# Allegro board CPDK.brd
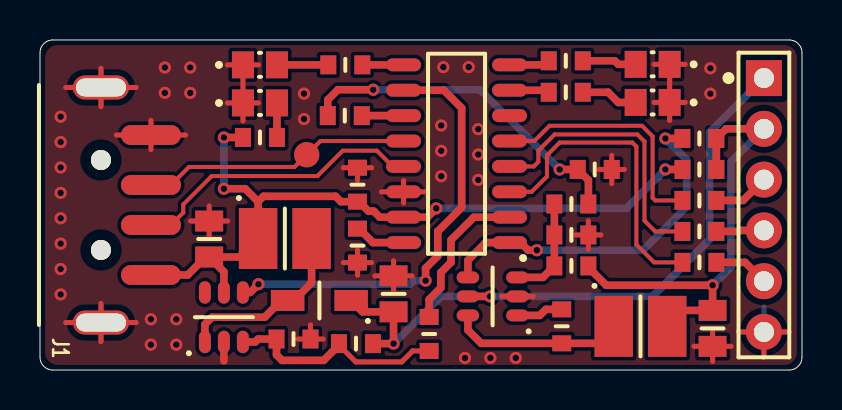
[diagram p0: board, top side]
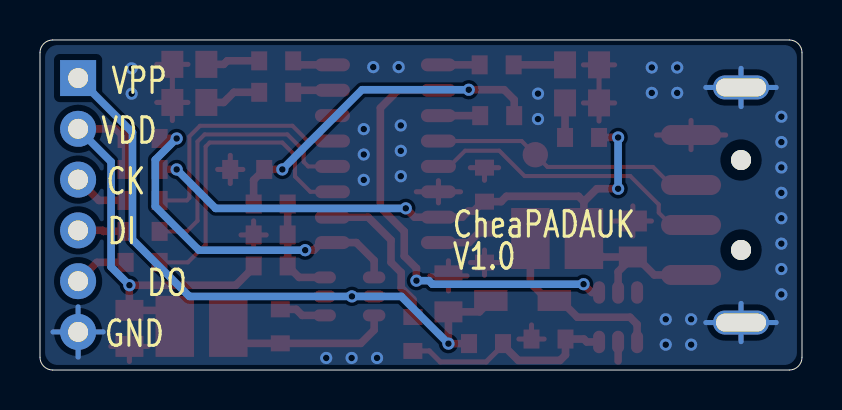
[diagram p1: board, bottom side, seen from below]

Outline 38.1 x 16.51 mm; copper layers: TOP, BOTTOM. Coordinates in mm from the lower left corner of the outline.
Outline path: 0,15.88 0,0.64 arc(0.19,0.19) 0.64,0 37.47,0 arc(37.91,0.19) 38.1,0.64 38.1,15.88 arc(37.91,16.32) 37.47,16.51 0.64,16.51 arc(0.19,16.32) 0,15.88

## Design rules (mm)
constraint set DEFAULT: min track width 0.203

## Placement (name value [footprint] x y rotation side)
C1  4.7uF  [CAPC2013X125N]  8.46 6.55 90 top
C2  104  [CAPC1608X50N]  15.88 9.27 90 top
C3  104  [CAPC1608X50N]  15.88 6.22 270 top
C4  104  [CAPC1608X50N]  26.09 2.18 270 top
C5  4.7uF  [CAPC2013X125N]  33.63 2.08 270 top
C6  104  [CAPC1608X50N]  27.74 10.03 0 top
C7  4.7uF 25V  [CAPC2013X125N]  17.68 3.81 90 top
D1  SS24  [DIOM3618X280N]  13.97 3.48 180 top
D2  PWR  [LEDC2012X140N]  11 13.36 0 top
D3  LED1  [LEDC2012X140N]  11 15.27 0 top
D4  LED2  [LEDC2012X140N]  30.63 15.29 180 top
D5  LED3  [LEDC2012X140N]  30.63 13.39 180 top
J1  USB  [USB_07]  3.05 8.26 270 top
J2  PDK  [SHDR0S254P6X1_1524X254X500]  36.2 14.61 270 top
L1  6.8uH  [INDM3530X280N]  12.24 6.58 0 top
L2  6.8uH  [INDM3530X280N]  30.02 2.18 0 top
R1  47  [CAPC1608X50N]  32.97 8.48 0 top
R2  47  [CAPC1608X50N]  32.97 6.93 0 top
R3  47  [CAPC1608X50N]  32.97 5.38 0 top
R4  20k  [CAPC1608X50N]  15.24 12.73 180 top
R5  NC  [CAPC1608X50N]  32.97 10.03 0 top
R6  NC  [CAPC1608X50N]  32.97 11.58 0 top
R7  24k  [CAPC1608X50N]  26.57 5.21 180 top
R8  6.8k  [CAPC1608X50N]  26.57 8.31 180 top
R9  36k  [CAPC1608X50N]  15.8 1.32 180 top
R10  56k  [CAPC1608X50N]  19.46 1.8 270 top
R11  2.7k  [CAPC1608X50N]  26.57 6.76 0 top
R12  2.2k  [CAPC1608X50N]  12.67 1.55 0 top
R13  R  [CAPC1608X50N]  11 11.63 0 top
R14  R  [CAPC1608X50N]  15.27 15.27 180 top
R15  R  [CAPC1608X50N]  26.29 15.47 0 top
R16  R  [CAPC1608X50N]  26.29 13.89 0 top
TP1  DL  [TP127]  13.34 10.77 0 top
U1  CH551G  [SOP127P600X140-16N]  20.83 10.82 180 top
U2  MT3608  [SOT95P280X112-6N]  9.19 2.64 90 top
U3  FR9885  [SOT95P280X112-6N]  22.63 3.68 180 top

## Library data of the parts
C1-C7 = CAP NP
D1 = DIODE
D2-D5 = LED
J1 = USB B TYPE
J2 = CON6
L1 L2 = INDUCTOR
R1-R16 = R
TP1 = T POINT R
U1 = CH551G
U2 = MT3608
U3 = FR9885

## Footprints (pads in the part's own frame, mm; a bottom-side part is the same pattern mirrored in y, then rotated)
CAPC1608X50N
  rect 0.8x0.95 smd: 1(-0.85,0) 2(0.85,0)
CAPC2013X125N
  rect 1.05x1.4 smd: 1(-0.9,0) 2(0.9,0)
DIOM3618X280N
  rect 1.675x1.05 smd: 1(-1.587,0) 2(1.587,0)
INDM3530X280N
  rect 1.925x3.05 smd: 1(-1.338,0) 2(1.338,0)
LEDC2012X140N
  rect 1.1x1.35 smd: 1(-0.85,0) 2(0.85,0)
SHDR0S254P6X1_1524X254X500
  rect 1.8x1.8 hole 1: 1(0,0)
  round 1.8 hole 1: 2(2.54,0) 3(5.08,0) 4(7.62,0) 5(10.16,0) 6(12.7,0)
SOP127P600X140-16N
  oval 1.75x0.65 smd: 1(-2.65,4.445) 2(-2.65,3.175) 3(-2.65,1.905) 4(-2.65,0.635) 5(-2.65,-0.635) 6(-2.65,-1.905) 7(-2.65,-3.175) 8(-2.65,-4.445) 9(2.65,-4.445) 10(2.65,-3.175) 11(2.65,-1.905) 12(2.65,-0.635) 13(2.65,0.635) 14(2.65,1.905) 15(2.65,3.175) 16(2.65,4.445)
SOT95P280X112-6N
  oval 1.125x0.6 smd: 1(-1.237,0.95) 2(-1.237,0) 3(-1.237,-0.95) 4(1.237,-0.95) 5(1.237,0) 6(1.237,0.95)
TP127
  round 1.27 smd: 1(0,0)
USB_07
  round 1 hole 1.3 unplated: (-2.25,0) (2.25,0)
  oval 1x3 smd: 1(3.5,2.5) 2(1,2.5) 3(-1,2.5) 4(-3.5,2.5)
  oval 1.2x2.8 hole 0.9x2.5: M1(5.88,0) M2(-5.88,0)

## Nets
5V: C1.1 C2.1 J1.1(VBUS) L1.1 R5.1 R13.1 U1.15(VDD) U2.5
GND: C1.2 C2.2 C3.2 C5.2 C6.2 C7.2 D2.1(CATHODE) D3.1(CATHODE) D4.1(CATHODE) D5.1(CATHODE) J1.4 J1.M1 J1.M2 J2.6 R11.2 R12.2 U1.14 U2.2 U3.2
VDD: C5.1 J2.2 L2.2 R5.2 R6.2 R7.1
VDD_EN: R6.1 U1.1 U3.4
LED1: R14.1 U1.9
LED2: R15.1 U1.8
LED3: R16.1 U1.7
MISO: R2.1 U1.4
MOSI: R3.1 U1.3
PWM2: R4.1 U1.11
SCK: R1.1 U1.5
USB_DM: J1.2 U1.13
USB_DP: J1.3 TP1.1(TP) U1.12
VPP: C7.1 D1.1(K) J2.1 R9.1 U3.5(VIN)
VPP_EN: U1.10 U2.4
VPP_SEL: R10.1 U1.2
N01030: R9.2 R10.2 R12.1 U2.3
N01431: D1.2 L1.2 U2.1(SW)
N02182: R7.2 R8.2 R11.1 U3.3
N02430: J2.3 R1.2
N02432: J2.4 R2.2
N02436: J2.5 R3.2
N02570: C6.1 R4.2 R8.1
N02792: C3.1 U1.16
N03295: C4.1 U3.1
N03302: C4.2 L2.1 U3.6
N04380: D3.2 R14.2
N04451: D4.2 R15.2
N04568: D5.2 R16.2
N04951: D2.2 R13.2

Pads without a net: U1 6; U2 6

## Via types
v1: diameter 0.61, hole 0.33, TOP to BOTTOM, 44 vias

## Routing (per net, layer and track width the routed paths; a pad name or vN(x,y) marks a point on that pad's centre or on a via; arc(x,y) is an arc through that point)
5V: length 38.3
  TOP w0.381: 10.91,8.42 11.17,8.69 14.78,8.69 15.05,8.42 C2.1 15.95,8.42 16.42,7.95 16.68,7.95 16.99,7.65 U1.15 19.37,7.65 v1(19.81,8.09) ; 10.91,8.42 L1.1 9.98,5.65 C1.1 ; 10.91,8.42 10.26,9.07 v1(9.19,9.07) ; C1.1 9.19,4.92 U2.5 ; C1.1 8.28,5.65 7.38,4.75 J1.1 ; R5.1 v1(31.27,10.03) ; R13.1 v1(9.19,11.63)
  BOTTOM w0.381: v1(31.27,10.03) 29.32,8.09 v1(19.81,8.09) ; v1(9.19,11.63) v1(9.19,9.07)
GND: length 75
  TOP w0.254: 8.46,6.7 C1.2 ; C1.2 7.53,7.45 ; C1.2 9.39,7.45 ; C1.2 8.46,8.21 ; J1.M2 4.8,14.14 ; J1.M2 1.29,14.14 ; J1.M2 3.05,15.09 ; J1.M2 3.05,13.18 ; C3.2 16.58,5.37 ; C3.2 15.88,6 ; C3.2 15.17,5.37 ; C3.2 15.88,4.74 ; 3.05,1.42 J1.M1 ; J1.M1 1.29,2.37 ; J1.M1 3.05,3.33 ; J1.M1 4.8,2.37 ; C5.2 33.63,1.94 ; C5.2 32.7,1.18 ; C5.2 33.63,0.43 ; C5.2 34.56,1.18 ; 23.08,3.68 U3.2 24.66,3.68 ; 16.75,4.71 C7.2 ; C7.2 17.68,5.46 ; C7.2 18.61,4.71 ; C7.2 17.68,3.96 ; 30.7,13.39 D5.1 ; D5.1 32.26,13.39 ; D5.1 31.48,12.48 ; D5.1 31.48,14.29 ; 10.15,14.36 D3.1 ; D3.1 9.37,15.27 ; D3.1 10.93,15.27 ; 12.9,1.55 R12.2 ; R12.2 13.52,2.25 ; R12.2 14.15,1.55 ; 34.94,1.91 36.2,1.91 ; 36.2,1.91 36.2,0.65 ; 36.2,1.91 37.45,1.91 ; U1.14 18.18,9.47 ; U1.14 18.18,8.36 ; U1.14 17.07,8.92 ; U1.14 19.28,8.92 ; R11.2 27.42,7.46 ; R11.2 27.42,6.05 ; R11.2 28.05,6.76 ; R11.2 26.79,6.76 ; 15.17,10.12 C2.2 ; C2.2 16.58,10.12 ; C2.2 15.88,9.49 ; 28.59,9.33 C6.2 ; C6.2 29.22,10.03 ; C6.2 27.96,10.03 ; C6.2 28.59,10.74 ; 3.82,11.76 J1.4 ; J1.4 5.55,11.03 ; J1.4 5.55,12.48 ; J1.4 7.28,11.76 ; 9.37,13.36 D2.1 ; D2.1 10.15,14.26 ; D2.1 10.15,12.46 ; D2.1 10.93,13.36 ; 31.48,14.39 D4.1 ; D4.1 32.26,15.29 ; D4.1 30.7,15.29
  TOP w0.381: U2.2 9.19,0.46
  BOTTOM w0.254: J1.M2 4.8,14.14 ; J1.M2 1.29,14.14 ; J1.M2 3.05,15.09 ; J1.M2 3.05,13.18 ; 36.2,1.91 37.45,1.91 ; 36.2,1.91 36.2,3.16 ; 36.2,1.91 36.2,0.65 ; 36.2,1.91 34.94,1.91 ; 1.29,2.37 J1.M1 ; J1.M1 4.8,2.37 ; J1.M1 3.05,1.42 ; J1.M1 3.05,3.33
  vias: v1(1.03,12.67) v1(1.03,11.4) v1(1.03,10.13) v1(1.03,8.86) v1(1.03,7.59) v1(1.03,6.32) v1(1.03,5.05) v1(1.03,3.78) v1(5.54,2.54) v1(5.54,1.27) v1(6.24,15.13) v1(6.24,13.86) v1(6.81,2.54) v1(6.81,1.27) v1(7.51,15.13) v1(7.51,13.86) v1(13.2,13.83) v1(13.2,12.56) v1(20.06,12.23) v1(20.06,10.96) v1(20.06,9.69) v1(20.17,15.15) v1(21.25,0.6) v1(21.44,15.15) v1(21.91,12.05) v1(21.91,10.78) v1(21.91,9.51) v1(22.52,0.6) v1(23.79,0.6) v1(33.52,15.09) v1(33.52,13.82)
VDD: length 23.5
  TOP w0.381: 36.2,12.06 34.3,12.06 R6.2 R5.2 ; R7.1 27.42,5.13 28.31,4.24 v1(33.63,4.24) C5.1 32.16,2.98 L2.2
  BOTTOM w0.381: v1(33.63,4.24) 34.54,5.16 34.54,10.41 36.2,12.06
VDD_EN: length 17.9
  TOP w0.381: R6.1 v1(31.27,11.58) ; v1(24.84,5.99) 24.41,5.99 24.03,6.38 U1.1 22.29,6.38 21.39,5.48 U3.4
  BOTTOM w0.381: v1(31.27,11.58) 32.33,10.52 32.33,8.18 30.15,5.99 v1(24.84,5.99)
LED1: length 2.1
  TOP w0.381: U1.9 R14.1
LED2: length 2
  TOP w0.381: U1.8 25.24,15.27 R15.1
LED3: length 2
  TOP w0.381: R16.1 25.34,14 U1.7
MISO: length 14
  TOP w0.203: U1.4 24.69,10.19 24.92,10.41 24.92,10.97 25.73,11.79 29.87,11.79 30.23,11.43 30.23,7.47 30.76,6.93 R2.1
MOSI: length 15.6
  TOP w0.203: U1.3 24.58,8.92 25.35,9.68 25.35,10.74 25.98,11.38 29.62,11.38 29.82,11.18 29.82,6.27 30.71,5.38 R3.1
PWM2: length 2.1
  TOP w0.381: U1.11 R4.1
SCK: length 12.3
  TOP w0.203: U1.5 24.71,11.46 25.48,12.22 30.1,12.22 30.63,11.68 30.63,8.61 30.76,8.48 R1.1
USB_DM: length 14.7
  TOP w0.203: U1.13 17.63,10.19 16.84,10.97 15.14,10.97 13.87,9.7 8.59,9.7 7.16,8.28 7.16,7.87 6.55,7.26 J1.2
USB_DP: length 13.5
  TOP w0.203: J1.3 6.55,9.25 7.45,10.16 12.72,10.16 TP1.1 14.02,11.46 U1.12
VPP: length 33.2
  TOP w0.381: U3.5 v1(22.5,3.68) ; R9.1 v1(17.68,1.32) C7.1 16.13,2.91 D1.1
  BOTTOM w0.381: J2.1 33.48,11.89 33.48,6.53 30.63,3.68 v1(22.5,3.68) 20.04,3.68 v1(17.68,1.32)
VPP_EN: length 22
  TOP w0.381: v1(19.28,4.47) 19.28,5.09 19.89,5.7 19.89,6.93 21.08,8.13 21.08,13.11 20.19,14 U1.10 ; v1(10.92,4.29) 10.51,3.88 U2.4
  BOTTOM w0.381: v1(19.28,4.47) 18.66,4.47 18.48,4.29 v1(10.92,4.29)
VPP_SEL: length 7.7
  TOP w0.381: U1.2 21.69,7.65 20.55,6.5 20.55,5.38 20.04,4.88 20.04,4.11 19.46,3.53 R10.1
N01030: length 11.2
  TOP w0.254: 14.95,1.25 15.79,0.41 18.08,0.41 18.63,0.95 R10.2
  TOP w0.381: U2.3 10.76,1.4 10.91,1.55 R12.1 11.82,0.76 12.1,0.48 14.19,0.48 14.95,1.25 R9.2
N01431: length 9.3
  TOP w0.381: U2.1 8.24,2.28 8.6,2.64 11.23,2.64 12.07,3.48 D1.2 12.69,3.48 13.58,4.37 L1.2
N02182: length 5.2
  TOP w0.381: U3.3 25.14,4.63 R7.2 R11.1 R8.2
N02430: length 2.8
  TOP w0.381: J2.3 35.15,8.48 R1.2
N02432: length 2.4
  TOP w0.381: J2.4 34.98,6.99 34.93,6.93 R2.2
N02436: length 2.8
  TOP w0.381: J2.5 35.26,5.38 R3.2
N02570: length 17.1
  TOP w0.381: v1(25.98,10.03) C6.1 27.42,9.5 R8.1 ; R4.2 14.39,13.52 14.89,14.02 v1(16.66,14.02)
  BOTTOM w0.381: v1(25.98,10.03) 22,14.02 v1(16.66,14.02)
N02792: length 2.6
  TOP w0.381: U1.16 16.65,6.38 15.95,7.07 C3.1
N03295: length 2.3
  TOP w0.381: U3.1 24.99,2.73 25.29,3.03 C4.1
N03302: length 8.7
  TOP w0.381: L2.1 27.84,1.33 C4.2 22.06,1.33 21.39,2 U3.6
N04380: length 2.6
  TOP w0.381: R14.2 D3.2
N04451: length 2.7
  TOP w0.381: R15.2 28.74,15.47 28.91,15.29 D4.2
N04568: length 2.9
  TOP w0.381: R16.2 28.41,13.89 28.91,13.39 D5.2
N04951: length 1.7
  TOP w0.381: R13.2 D2.2

## Copper pours and planes (outline as drawn; the poured copper is in the pictures)
GND on TOP, BOTTOM: 0.25,15.64 0.44,16.07 0.87,16.26 37.23,16.26 37.66,16.07 37.85,15.64 37.85,0.87 37.66,0.44 37.23,0.25 0.87,0.25 0.44,0.44 0.25,0.87

## Text on the board
Ref Des/Silkscreen Bottom: CheaPADAUK | V1.0 | DO | VPP | DI | CK | GND | VDD
